# Altium PCB PCB.PcbDoc
Units mm, origin at the board's own origin, x right, y up, seen from the top; angles counter-clockwise.
Board outline 39.51 x 36.13 mm, 2 copper layers (Top Layer, Bottom Layer); 14 components, 9 nets, 33 pads, 6 vias.
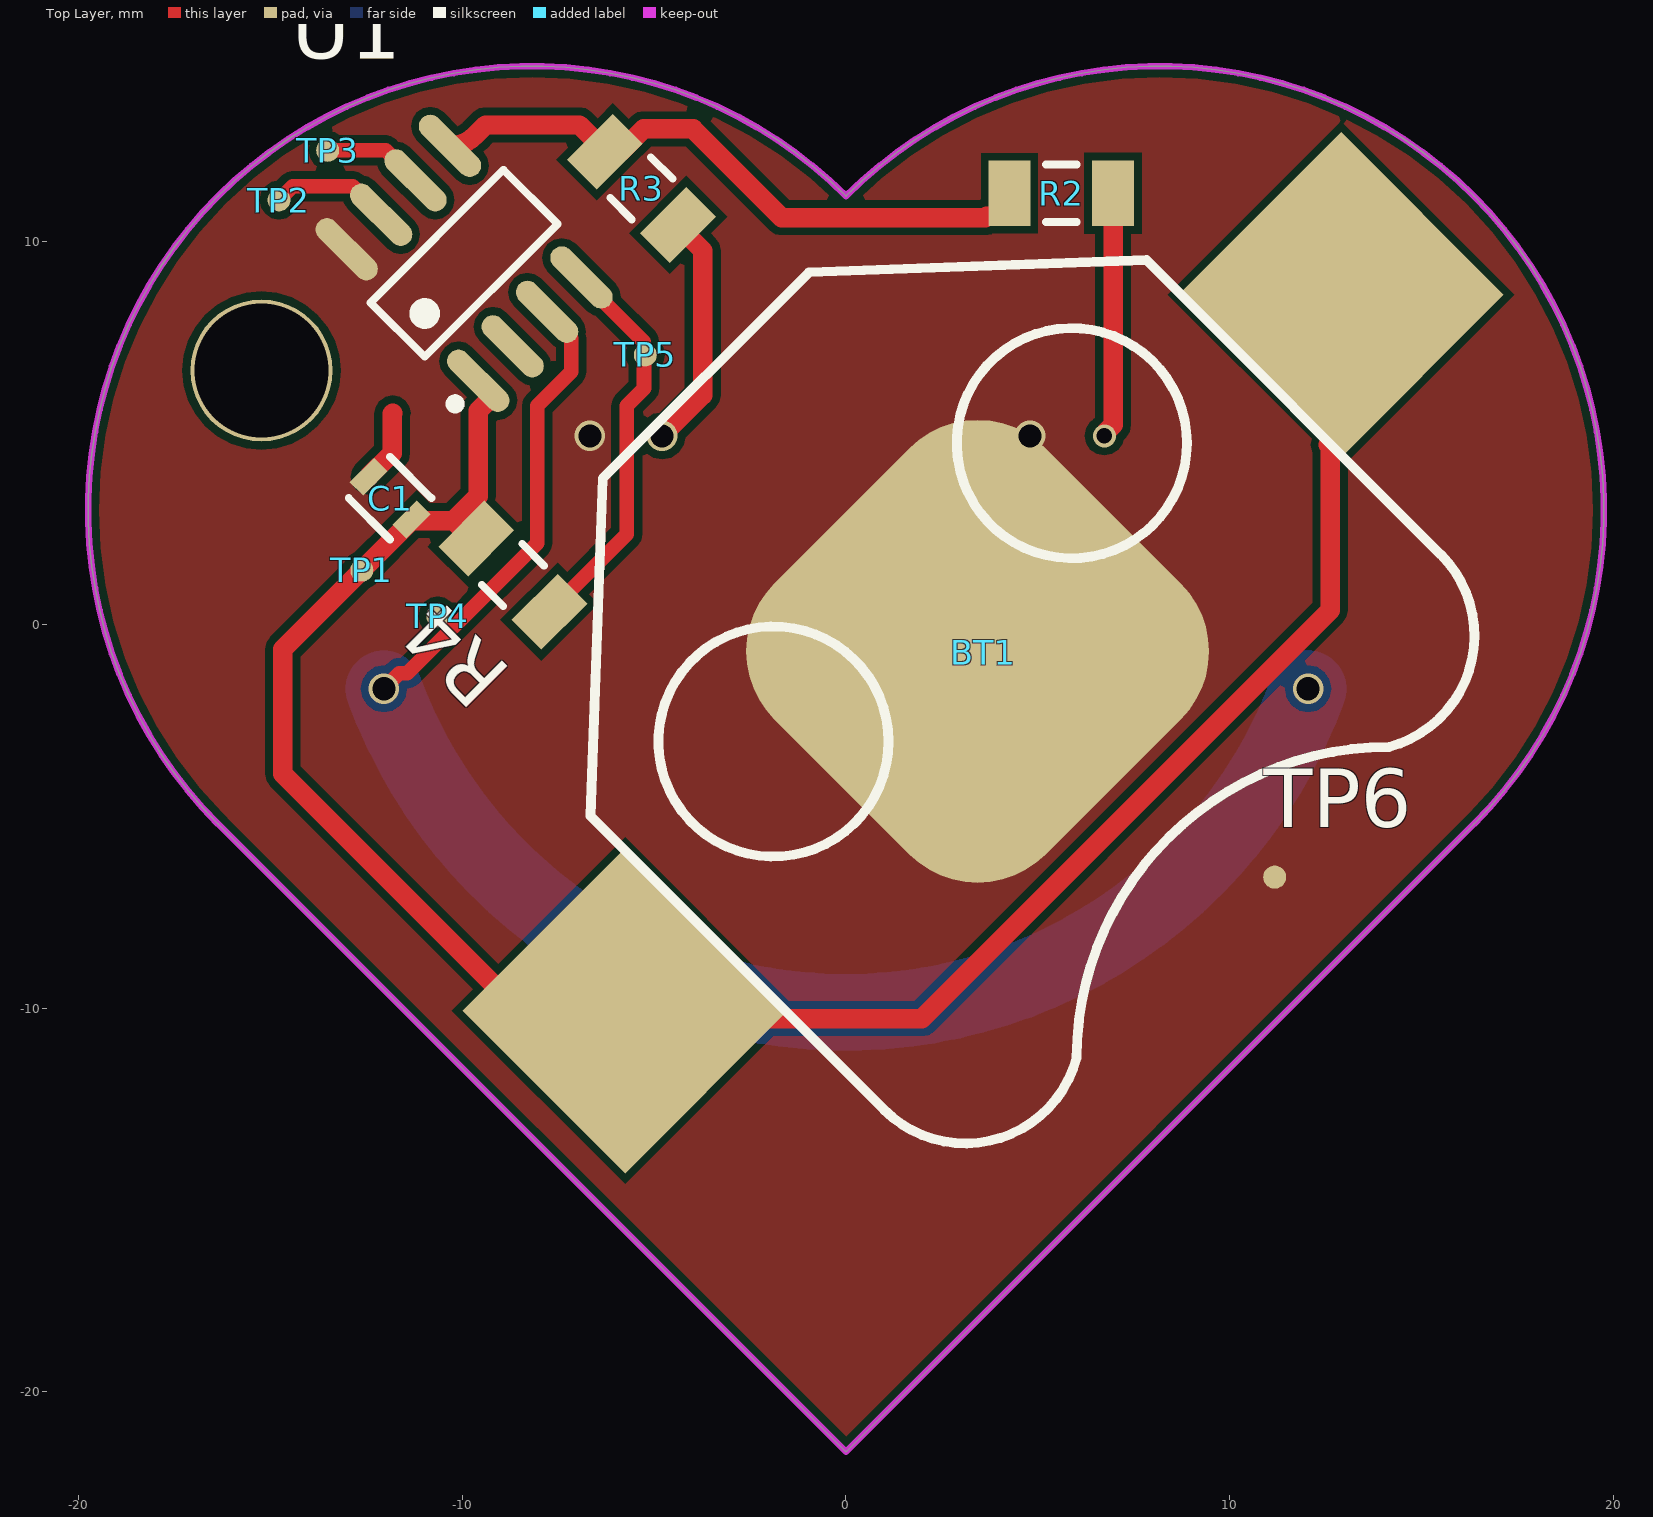
[diagram p0: Top Layer view]
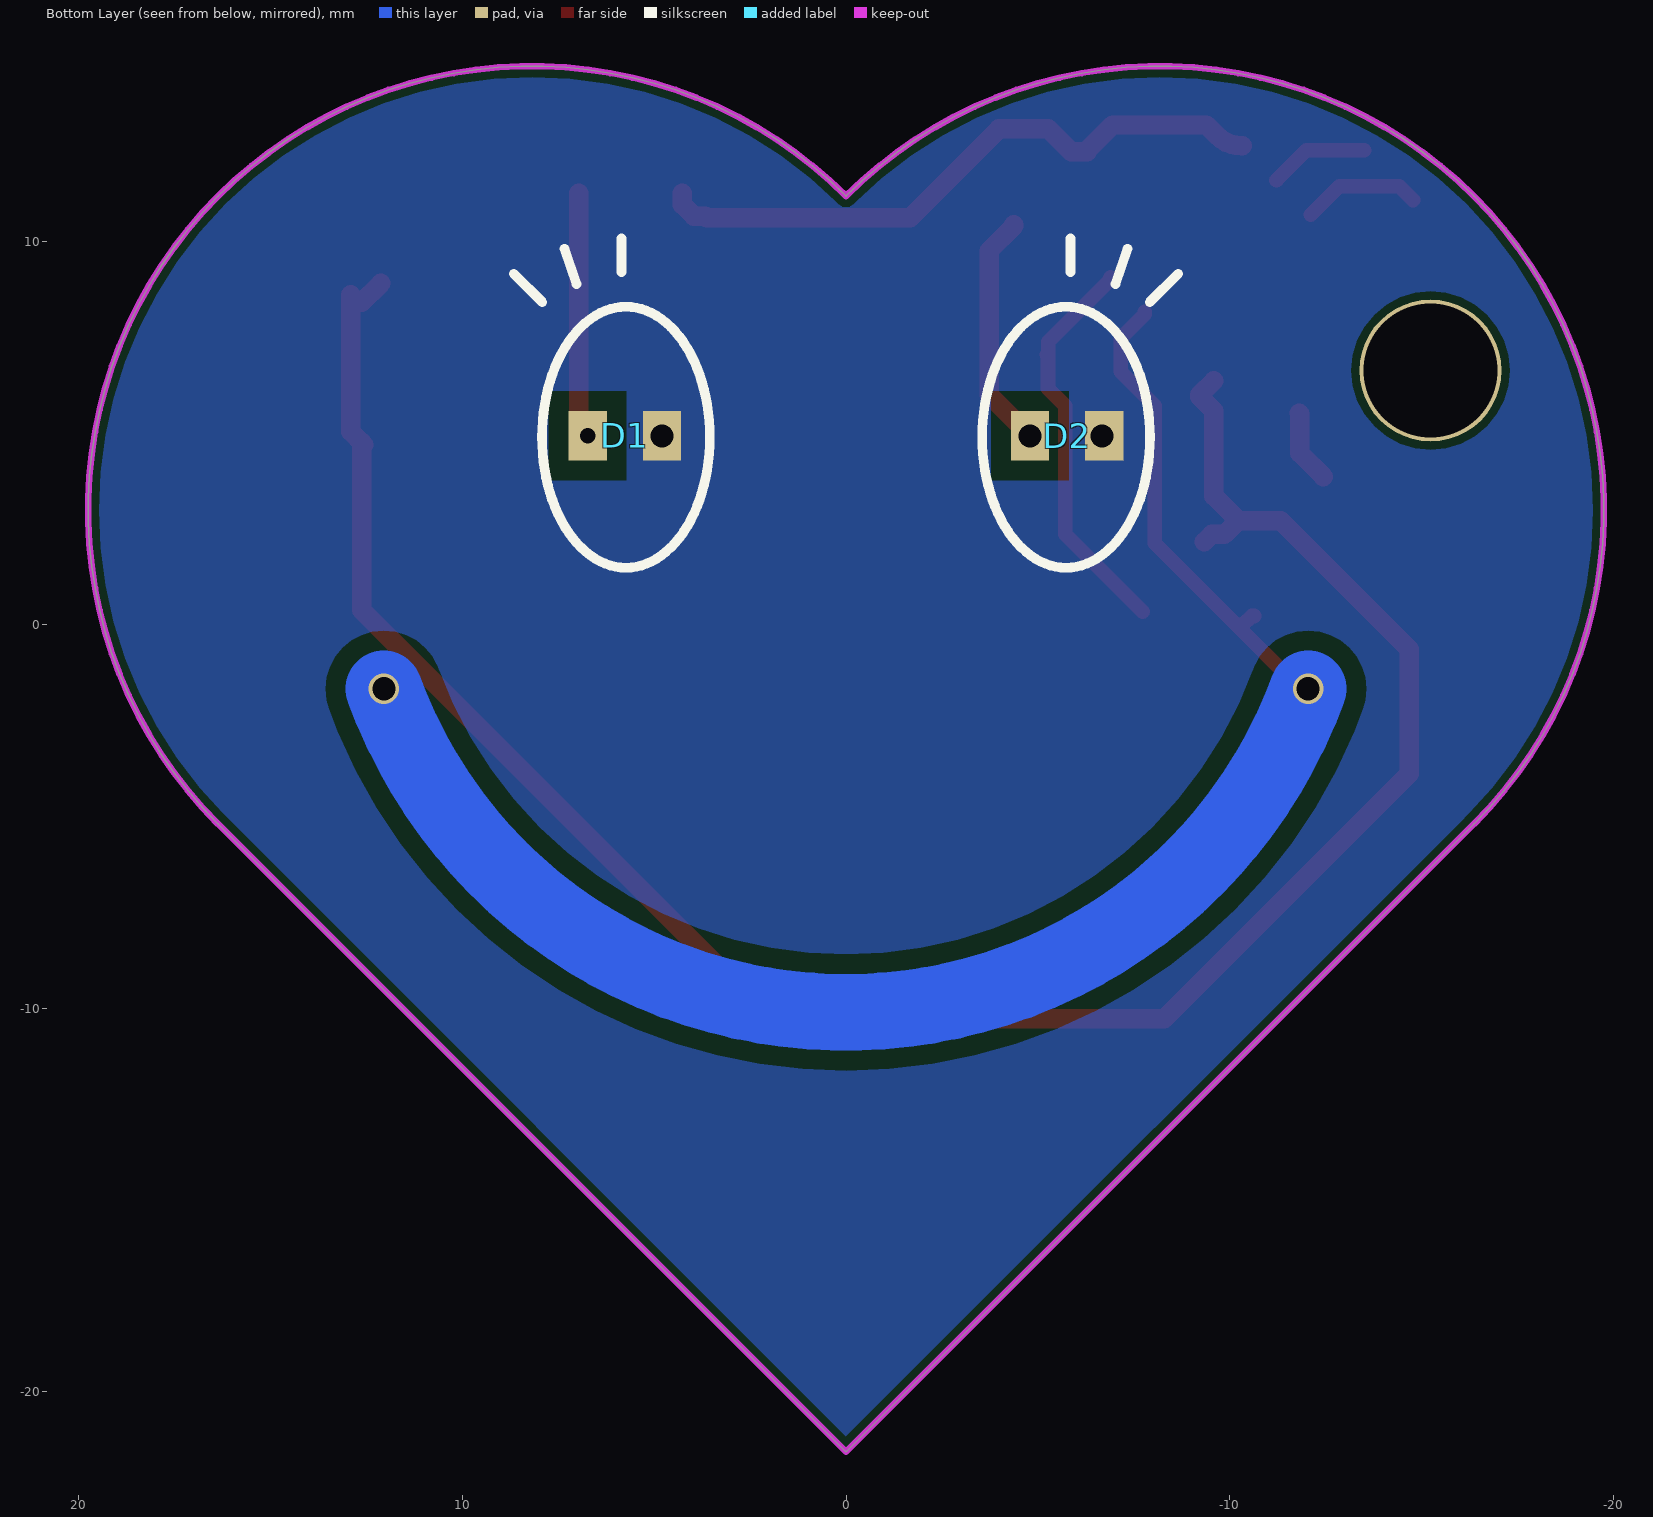
[diagram p1: Bottom Layer view, seen from below]

## Layer stack, top to bottom
Top Solder: solder mask 0.0102, Solder Resist, Dk 3.5
Top Layer: signal copper 0.0356
Dielectric 1: dielectric 0.32, FR-4, Dk 4.8
Bottom Layer: signal copper 0.0356
Bottom Solder: solder mask 0.0102, Solder Resist, Dk 3.5

## Board outline
-16.37,-5.194 0,-21.563 16.37,-5.194 ccw(c8.185,2.991) 0,11.176 ccw(c-8.185,2.991)

## Design rules (kind name [scope] priority, off if disabled: settings)
AssemblyTestPointUsage [All] p1 off:
AssemblyTestpoint [All] p1 off: testpointundercomponent=TRUE minsize=1.016 maxsize=2.54 preferedsize=1.524 minholesize=0 maxholesize=1.016 preferedholesize=0.813 testpointgrid=0.025 usegrid=TRUE gridtolerance=0 allowsidetop=TRUE allowsidebottom=TRUE
Clearance "Poly Clearance" [IsRegion vs OnLayer('Bottom Layer')] p1: gap=0.508 ignorepadtopadclearanceinfootprint=FALSE
Clearance [All] p2: gap=0.203 ignorepadtopadclearanceinfootprint=FALSE except(0: Arc-Hole Track-Hole SMDPad-Hole THPad-Hole Via-Hole Fill-Hole Poly-Hole Region-Hole Text-Hole)
ComponentClearance [All] p1 off: gap=0.254 collisioncheckmode=3 verticalgap=0.254 showdistances=FALSE
DiffPairsRouting [All] p1: maxlimit=0.254 minlimit=0.254 mostfreqgap=0.254 toplayer_minwidth=0.381 toplayer_maxwidth=0.381 toplayer_prefwidth=0.381 bottomlayer_minwidth=0.381 bottomlayer_maxwidth=0.381 bottomlayer_prefwidth=0.381 substack1={389A572C-4A8D-47E9-83B2-7C0AE24C6ED4} toplayer_{389a572c-4a8d-47e9-83b2-7c0ae24c6ed4}_minwidth=0.381 toplayer_{389a572c-4a8d-47e9-83b2-7c0ae24c6ed4}_maxwidth=0.381 toplayer_{389a572c-4a8d-47e9-83b2-7c0ae24c6ed4}_prefwidth=0.381 bottomlayer_{389a572c-4a8d-47e9-83b2-7c0ae24c6ed4}_minwidth=0.381 bottomlayer_{389a572c-4a8d-47e9-83b2-7c0ae24c6ed4}_maxwidth=0.381 bottomlayer_{389a572c-4a8d-47e9-83b2-7c0ae24c6ed4}_prefwidth=0.381 substack2={E89006B9-882C-407B-A56C-F4B155C82CC5} toplayer_{e89006b9-882c-407b-a56c-f4b155c82cc5}_minwidth=0.381 toplayer_{e89006b9-882c-407b-a56c-f4b155c82cc5}_maxwidth=0.381 toplayer_{e89006b9-882c-407b-a56c-f4b155c82cc5}_prefwidth=0.381 bottomlayer_{e89006b9-882c-407b-a56c-f4b155c82cc5}_minwidth=0.381 bottomlayer_{e89006b9-882c-407b-a56c-f4b155c82cc5}_maxwidth=0.381 bottomlayer_{e89006b9-882c-407b-a56c-f4b155c82cc5}_prefwidth=0.381 maxuncoupledlength=12.7
FabricationTestPointUsage [All] p1 off: valid=0 allowmultiple=FALSE
FabricationTestpoint [All] p1 off: side=3 testpointundercomponent=TRUE minsize=1.016 maxsize=2.54 preferedsize=1.524 minholesize=0 maxholesize=1.016 preferedholesize=0.813 testpointgrid=0.025 allowsidetop=TRUE allowsidebottom=TRUE usegrid=TRUE gridtolerance=0
FanoutControl Fanout_BGA [IsBGA] p1 off: bgadir=Out bgaviamode=Centered fanoutstyle=Auto fanoutdirection=Alternating viagrid=0.025 // Fanout_BGA (Default Rule)
FanoutControl Fanout_LCC [IsLCC] p2 off: bgadir=Out bgaviamode=Centered fanoutstyle=Auto fanoutdirection=Alternating viagrid=0.025 // Fanout_LCC (Default Rule)
FanoutControl Fanout_SOIC [IsSOIC] p3 off: bgadir=Out bgaviamode=Centered fanoutstyle=Auto fanoutdirection=Alternating viagrid=0.025 // Fanout_SOIC (Default Rule)
FanoutControl Fanout_Small [(CompPinCount < 5)] p4 off: bgadir=Out bgaviamode=Centered fanoutstyle=Auto fanoutdirection=OutThenIn viagrid=0.025 // Fanout_Small (Default Rule)
FanoutControl Fanout_Default [All] p5 off: bgadir=Out bgaviamode=Centered fanoutstyle=Auto fanoutdirection=Alternating viagrid=0.025 // Fanout_Default (Default Rule)
Height [All] p1 off: minheight=0 maxheight=25.4 prefheight=12.7
HoleSize [All] p1: absolutevalues=TRUE maxlimit=6.3 minlimit=0.3 maxpercent=80.000 minpercent=20.000
MinimumSolderMaskSliver [All] p1 off: minsoldermaskwidth=0.254
NetAntennae [All] p1 off: netantennaetolerance=0
PasteMaskExpansion [All] p1 off: expansion=0
PlaneConnect [All] p1: planeconnectstyle=Direct reliefexpansion=0.508 reliefentries=4 reliefconductorwidth=0.254 reliefairgap=0.254
PolygonConnect [All] p1: connectstyle=Direct reliefconductorwidth=0.508 reliefentries=4 polygonreliefangle="45 Angle" airgapwidth=0.508
RoutingVias [All] p1: holewidth=0.4 width=0.6 viastyle="Through Hole" minholewidth=0.4 minwidth=0.6 maxholewidth=10 maxwidth=10
SilkToSilkClearance [All] p1 off: silktosilkclearance=0.254
SilkToSolderMaskClearance [IsPad] p1 off: minsilkscreentomaskgap=0.254 clearancetoexposedcopper=TRUE
SolderMaskExpansion [All] p1 off: expansion=0.102 istentingtop=FALSE
UnpouredPolygon [All] p1: allowshelved=TRUE
Width [All] p1: maxlimit=12.7 minlimit=0.152 preferedwidth=0.254 substack1={389A572C-4A8D-47E9-83B2-7C0AE24C6ED4} substack2={E89006B9-882C-407B-A56C-F4B155C82CC5}
10 further rules are at their usual default settings.

## Components (designator, comment, footprint, x,y, rotation, side; value= is the part's Value field where it differs from the comment)
BT1 "Battery" "CR2032 SMD" -3.658,6.502 r45 top
C1 "Cap" "0603 - CAP" -11.887,3.302 r315 top value=4.7u
D1 "LED" "0805 -  LED" 5.766,4.928 r180 bottom
D2 "LED" "0805 -  LED" -5.766,4.928 r180 bottom
R2 "Res2" C1206 5.613,11.252 r180 top value=1K
R3 "Res2" C1206 -5.334,11.379 r135 top value=1K
R4 "Res2" C1206 -8.687,1.295 r135 top value=2k2
TP1 "TPAD6R" TP06R -12.624,1.422 r0 top
TP2 "TPAD6R" TP06R -14.783,11.074 r90 top
TP3 "TPAD6R" TP06R -13.513,12.37 r90 top
TP4 "TPAD6R" TP06R -10.643,0.229 r90 top
TP5 "TPAD6R" TP06R -5.232,7.036 r90 top
TP6 "TPAD6R" TP06R 11.176,-6.579 r90 top
U1 "PIC12LF1822-I/SN" MCHP-SOIC-SN8_N -9.957,9.423 r135 top

## Footprints (in the part's own frame and the unit in brackets; to place one, negate y for a bottom-side part, rotate by r counter-clockwise, add the part's x,y. Pads: shape width x height; smd on the part's side, far side on the other; paste and mask are expansions set on the pad)
"0603 - CAP" [mm]
  rect 0.5x0.9 smd: 1(-0.79,0) 2(0.79,0)
  silkscreen extent -0.76,-0.76 0.76,0.76, body extent -0.8,-0.44 0.8,0.46, height 0.8
"0805 -  LED" [mm]
  rect 1x1.3 smd: A(-0.97,0) K(0.97,0)
  body extent -1.01,-0.63 1.01,0.62, height 1.1
C1206 [mm] "Chip Capacitor, Body 3.2x1.6mm, IPC High Density"
  rect 1.1x1.7 smd: 1(-1.35,0) 2(1.35,0)
  silkscreen extent -0.4,-0.75 0.4,0.75, body extent -1.7,-0.9 1.7,0.9, height 1.3
"CR2032 SMD" [mm] "SMD Battery holder CR 2032"
  rect 6x6 smd: 1(-13.2,-10.225) 1(13.2,-10.225)
  rrect50% 10x10 smd: 2(-0.075,-10.1)
  silkscreen extent -10.25,-19.85 10.25,0, body extent -15.37,-19.98 15.37,0.07, height 3.96
MCHP-SOIC-SN8_N [mm] "SOIC, 8-Leads, Body 4.9x3.9mm, Pitch 1.27mm, IPC Medium Density"
  oval 2.05x0.6 smd: 1(-2.425,1.905) 2(-2.425,0.635) 3(-2.425,-0.635) 4(-2.425,-1.905) 5(2.425,-1.905) 6(2.425,-0.635) 7(2.425,0.635) 8(2.425,1.905)
  silkscreen extent -2.55,-2.45 1,2.88, body extent -1.95,-2.45 1.95,2.45, height 1.75
TP06R [mm] "Testpoint, round, d=0.6mm"
  round 0.6 smd paste-1: 1(0,0)

## Part data
BT1: "Multicell Battery", Distributor=Digikey, Distributor PN=BAT-HLD-002-SMT-ND, LatestRevisionDate=17-Jul-2002, LatestRevisionNote="Re-released for DXP Platform.", PackageDescription="Battery; 2 Leads", PackageReference=BAT-2, Published=24-Mar-1999, Publisher="Altium Limited"
C1: "Capacitor", Distributor=Digikey, Distributor PN=1276-2087-1-ND, LatestRevisionDate=17-Jul-2002, LatestRevisionNote="Re-released for DXP Platform.", PackageDescription="Radial Cap, Thru-Hole; 2 Leads; 0.3 in Pin Spacing", PackageReference=RAD-0.3, Published=8-Jun-2000, Publisher="Altium Limited"
D1: "Typical RED GaAs LED", Distributor=Digikey, Distributor PN=475-1278-1-ND, LatestRevisionDate=08-Jul-2005, LatestRevisionNote="Mech Layer 1 removed.", PackageDescription="LED; 2 Leads", PackageReference=LED-1, Published=8-Jun-2000, Publisher="Altium Limited", Supplier 1=Digi-Key, Supplier Part Number 2=475-1278-1-ND
D2: "Typical RED GaAs LED", Supplier Part Number 1=475-1278-1-ND, Distributor=Digikey, Distributor PN=475-1278-1-ND, LatestRevisionDate=08-Jul-2005, LatestRevisionNote="Mech Layer 1 removed.", PackageDescription="LED; 2 Leads", PackageReference=LED-1, Published=8-Jun-2000, Publisher="Altium Limited", Supplier 1=Digi-Key
R2 R3 R4: "Resistor", LatestRevisionDate=17-Jul-2002, LatestRevisionNote="Re-released for DXP Platform.", PackageDescription="Axial Device, Thru-Hole; 2 Leads; 0.4 in Pin Spacing", PackageReference=AXIAL-0.4, Published=8-Jun-2000, Publisher="Altium Limited"
TP1 TP2 TP3 TP4 TP5 TP6: library part CMP-00028-00002-1, "0.6mm round", Pins=1
U1: library part CMP-0190-00405-1, "Flash Microcontroller with XLP Technology, 32 MHz, 5 I/O, -40 to 85 degC, 8-pin SOIC (SN8), Tube", Manufacturer=Microchip, Operation Voltage Range="1.8V - 3.6V", # of A/D Channels=4, ComponentLink1Description=Datasheet, ComponentLink1URL=http://ww1.microchip.com/downloads/en/DeviceDoc/41413C.pdf, ComponentLink2Description="Package Specification", ComponentLink2URL=http://www.microchip.com/stellent/groups/techpub_sg/documents/packagingspec/en012702.pdf, ComponentLink3Description="URL Link1", ComponentLink3URL="Product URL:http://www.microchip.com/datasheet/PIC12F1822", DatasheetVersion="Rev. C", Digital Communication="1 -A/E/USART, 1 -MSSP(SPI/I2C)", EEPROM Data Memory (bytes)=256, I/O Pins=5, Internal Oscillator="32 MHz, 31 kHz", Max. CPU Speed MHz=32, Memory Type=Flash, Mounting Technology="Surface Mount", PackageDescription="8-Lead Plastic Small Outline, 4.9 x 3.9 mm Body, 1.27 mm Pitch", PackageReference=SOIC-SN8, PackageVersion="C04-057C, 12/2012", Packing=TUBE, PartNumber=PIC12LF1822-I/SN, Program Memory KBytes=3.5, Program Memory KWords=2, RAM=128, Timers="2 - 8-bit, 1 - 16-bit, 0 - 32-bit"

## Free pads (board coordinates)
  round 0.006 on Bottom Overlay: 1(0.606,10.427) 1(0.612,10.427)
  round 0.013 on Bottom Overlay: 1(0.609,10.427)
  round 3.7 hole 3.5: ""(-15.24,6.629)

## Via types
v1: diameter 0.8, hole 0.6, Top Layer to Bottom Layer, 5 vias
v2: diameter 0.6, hole 0.4, Top Layer to Bottom Layer, 1 vias

## Nets (pads, with @x,y where several pads share a name; then routed paths per layer and width w, separated by ;. In a path a pad name is that pad's centre, name@x,y a point inside that pad or via, vN(x,y) a via of type N, cw(c..) or ccw(c..) an arc to the next point about the centre after c; other vN are vias at no path point)
CLK: TP3.1 U1.6 | length 2.6
  Top Layer w0.381: TP3.1 -12.005,12.37 U1.6
DAT: TP2.1 U1.7 | length 3.1
  Top Layer w0.381: TP2.1 -14.427,11.43 -12.861,11.43 U1.7
GND: BT1.2 C1.1 D1.K D2.K TP6.1 U1.8 | length 1.9
  Top Layer w0.508: C1.1 -11.834,4.473 -11.834,5.497 -11.818,5.512
  other v1: -6.68,4.928 4.796,4.928
LED: R2.2 R3.2 U1.5 | length 16.7
  Top Layer w0.508: U1.5 ccw(c-10.324,13.406) -9.673,12.755 -9.398,13.03 -6.952,13.03 -6.289,12.366 R3.2 -5.87,12.334 -5.275,12.929 -3.988,12.929 -1.676,10.617 3.628,10.617 3.667,10.656 3.967,10.656 4.263,10.952 R2.2
NetD1_A: D1.A R2.1 | length 6.4
  Top Layer w0.508: v2(6.736,4.928) 6.782,4.973 6.782,5.029 6.963,5.211 R2.1
NetD2_A: D2.A R3.1 | length 6.2
  Top Layer w0.508: v1(-4.796,4.928) -3.734,5.99 -3.734,9.754 -4.379,10.399 R3.1
RST: R4.1 TP5.1 U1.4 | length 10.4
  Top Layer w0.381: R4.1 -5.715,2.358 -5.715,5.715 -5.266,6.164 -5.266,7.003 TP5.1 -5.274,7.078 -5.274,7.376 -6.895,8.996 U1.4
TOUCH: TP4.1 U1.3 | length 44.1
  Top Layer w0.381: v1(-12.049,-1.667) -11.644,-1.262 -11.437,-1.262 -10.256,-0.081 ; TP4.1 -10.583,0.229 -10.474,0.119 -10.457,0.119 -10.256,-0.081 ; U1.3 -7.793,8.098 -7.163,7.468 -7.163,6.597 -8.052,5.708 -8.052,2.123 -10.256,-0.081
  Bottom Layer w2: v1(-12.049,-1.667) ccw(c0,2.718) v1(12.049,-1.667)
VDD: BT1.1 C1.2 R4.2 TP1.1 U1.1 | length 57.9
  Top Layer w0.508: U1.1 -9.227,6 -9.227,5.94 -9.589,5.578 -9.589,3.357 -10.228,2.718 ; R4.2@-9.34,2.159 -9.536,2.355 -9.865,2.355 -10.228,2.718 ; BT1.1@12.127,8.902 BT1.1@12.627,8.403 ; BT1.1@12.573,4.699 BT1.1@12.627,4.753 ; BT1.1@12.906,8.606 12.906,5.032 BT1.1@12.627,4.753 ; -10.228,2.718 -11.329,2.718 -14.681,-0.635 -14.681,-3.886 -8.303,-10.265 1.978,-10.265 12.627,0.384 BT1.1@12.627,4.753
pads on no net: U1.2

## Polygon pours and split planes (outlines as drawn)
GND on Bottom Layer "GND_L02_P000" (solid, pour order 0): -16.37,-5.194 0,-21.563 16.37,-5.194 ccw(c8.185,2.991) 0,11.176 ccw(c-8.185,2.991)
GND on Top Layer "GND_L01_P001" (solid, pour order 1): -16.37,-5.194 0,-21.563 16.37,-5.194 ccw(c8.185,2.991) 0,11.176 ccw(c-8.185,2.991)

## Keep-outs
Keep-Out Layer:
  the board outline again, w0.168

## Silkscreen, mask and mechanical layers (free items; w line width, h text height)
Bottom Overlay:
  drawing of 206 lines, arcs and shapes, not listed
Bottom Solder:
  lines w2: -12.049,-1.667 ccw(c0,2.718) 12.049,-1.667